# Altium PCB DUTBoard_NO_CAPS_2.PcbDoc (part 5 of 5)
Units mil, origin at the board's own origin, x right, y up, seen from the top; angles counter-clockwise.
Board outline 5475 x 5475 mil, 4 copper layers (Top Layer, Mid-Layer 1, Mid-Layer 2, Bottom Layer); 57 components, 471 nets, 1641 pads, 1025 vias.
Unrouted connection lines stored in the file: 1.
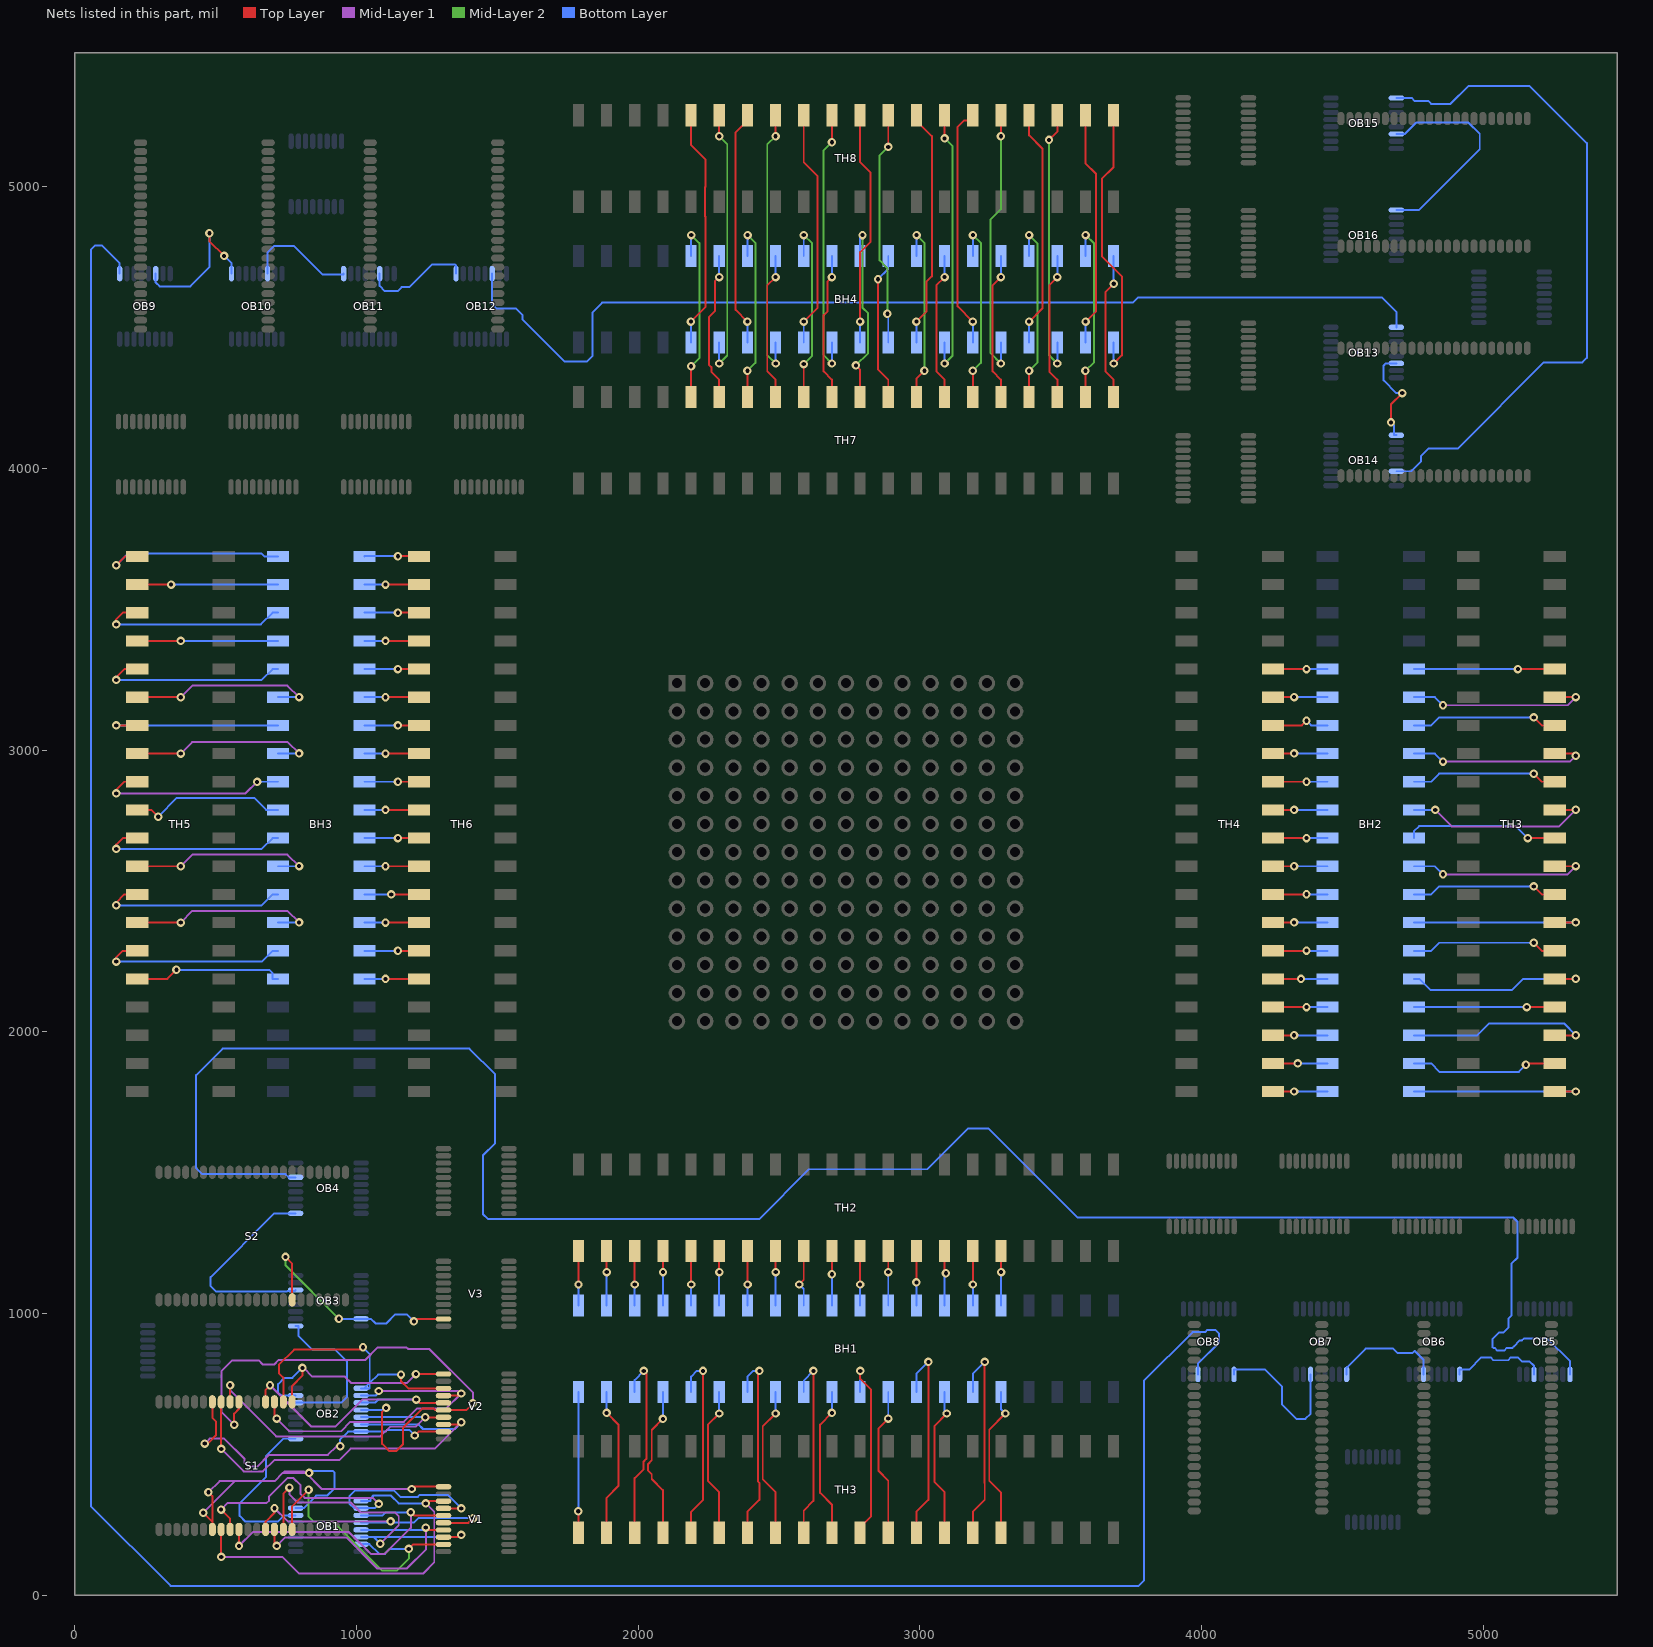
[diagram p7: the nets of this part, all layers, seen from the top]

## Via types
v1: diameter 30, hole 15, Top Layer to Bottom Layer, 1025 vias

## Nets (pads, with @x,y where several pads share a name; then routed paths per layer and width w, separated by ;. In a path a pad name is that pad's centre, name@x,y a point inside that pad or via, vN(x,y) a via of type N, cw(c..) or ccw(c..) an arc to the next point about the centre after c; other vN are vias at no path point) (continued)
OB_D_B111: OB3.D7 S2.DATA15 V3.OVL7 | length 866.1
  Top Layer w7: v1(748,1201) 771.73,1177.27 S2.DATA15@771.73,1048.62 ; v1(1204,972) 1212.43,980.43 V3.OVL7@1308.86,980.43
  Mid-Layer 2 w7: v1(748,1201) 748,1170.61 v1(937.58,981.02)
  Bottom Layer w7: v1(937.58,981.02) OB3.D7@1016.14,981.02 1051,981.02 1067.52,964.5 1105,964.5 1137.5,997 1179,997 v1(1204,972)
OB_D_B112: OB2.D0 S1.DATA0 V2.OVL0 | length 877.4
  Top Layer w7: S1.DATA0@771.73,686.38 771.73,742.73 808,779 v1(808,807) ; v1(1211,785.16) V2.OVL0@1308.86,785.16
  Mid-Layer 1 w7: v1(808,807) 812,807 843,776 958.5,776 980.5,754 1179.84,754 v1(1211,785.16)
  Bottom Layer w7: OB2.D0@783.86,708.98 732.02,708.98 722,719 722,749 744.5,771.5 772.5,771.5 v1(808,807)
OB_D_B113: OB2.D1 S1.DATA1 V2.OVL1 | length 983.1
  Top Layer w7: S1.DATA1@740.24,686.38 740.24,772.46 724.5,788.2 724.5,817.77 778.73,872 1015,872 v1(1023,880) ; v1(1158,783) 1158,759.98 1184,733.98 V2.OVL1@1308.86,733.98
  Bottom Layer w7: OB2.D1@1016.14,734.57 OB2.D1@1028,734.57 ; v1(1023,880) 1047,856 1047,753.57 ; v1(1158,783) 1076.43,783 1047,753.57 ; OB2.D1@1028,734.57 1047,753.57 ; OB2.D1@1028,734.57 1047,734.57 1047,753.57
OB_D_B114: OB2.D2 S1.DATA2 V2.OVL2 | length 1227.4
  Top Layer w7: S1.DATA2@708.74,686.38 708.74,635.26 v1(717,627) ; V2.OVL2@1308.86,708.39 1364.39,708.39 v1(1372,716)
  Mid-Layer 1 w7: v1(717,627) 762,582 945.09,582 978.09,615 1168,615 1216,663 1319,663 v1(1372,716) 1363.02,724.98 v1(1078.7,724.98)
  Bottom Layer w7: OB2.D2@1016.14,708.98 1067.68,708.98 1078.7,720 v1(1078.7,724.98)
OB_D_B115: OB2.D3 S1.DATA3 V2.OVL3 | length 985.7
  Top Layer w7: S1.DATA3@677.24,686.38 677.24,729.24 v1(693,745) ; v1(1212,694.3) 1223.5,682.8 V2.OVL3@1308.86,682.8
  Mid-Layer 1 w7: v1(693,745) 838.5,599.5 925.59,599.5 1020.39,694.3 v1(1212,694.3)
  Bottom Layer w7: OB2.D3@1016.14,683.39 1065.61,683.39 1076.52,694.3 v1(1212,694.3)
OB_D_B116: OB2.D4 S1.DATA4 V2.OVL4 | length 2008.4
  Top Layer w7: v1(566,605) 566,644.24 582.76,661 S1.DATA4@582.76,686.38 ; v1(1105,665) 1091,651 1091,537 1116,512 1141,512 1165,536 1165,594 1233,662 1275,662 1279.8,657.2 V2.OVL4@1308.86,657.2 1389.2,657.2 v1(1413,681)
  Mid-Layer 1 w7: v1(566,605) 521,650 521,796 558.5,833.5 653.5,833.5 668,819 708,819 724.5,835.5 819.81,835.5 820.31,835 1031,835 1076,880 1177,880 1183,874 1259,874 1413,720 v1(1413,681)
  Bottom Layer w7: OB2.D4@1016.14,657.8 1097.8,657.8 v1(1105,665)
OB_D_B117: OB2.D5 S1.DATA5 V2.OVL5 | length 1157.8
  Top Layer w7: S1.DATA5@551.26,686.38 v1(551.26,745) ; v1(1244.39,631.61) V2.OVL5@1308.86,631.61
  Mid-Layer 1 w7: v1(551.26,745) 551.26,727.74 715,564 1085,564 1119,598 1210.77,598 v1(1244.39,631.61)
  Bottom Layer w7: OB2.D5@1016.14,632.2 1243.8,632.2 v1(1244.39,631.61)
OB_D_B118: OB2.D6 S1.DATA6 V2.OVL6 | length 1563.8
  Top Layer w7: v1(519.76,519.24) S1.DATA6@519.76,686.38 ; V2.OVL6@1308.86,606.02 1364.02,606.02 v1(1372,614)
  Mid-Layer 1 w7: v1(519.76,519.24) 599.48,439.52 668,439.52 709.28,480.81 940.31,480.81 979.5,520 1278,520 v1(1372,614)
  Bottom Layer w7: OB2.D6@1016.14,606.61 1219.5,606.61 1236.11,590 1348,590 v1(1372,614)
OB_D_B119: OB2.D7 S1.DATA7 V2.OVL7 | length 1163.2
  Top Layer w7: v1(461.14,538.14) 471.41,538.14 502,568.73 502,615.53 488.27,629.26 S1.DATA7@488.27,686.38 ; v1(1207,567) 1220.43,580.43 V2.OVL7@1308.86,580.43
  Mid-Layer 1 w7: v1(461.14,538.14) 479,556 530.21,556 602.48,483.73 602.48,470.05 616,456.52 648,456.52 689.48,498 898.69,498 929.69,529 v1(942,529)
  Bottom Layer w7: v1(942,529) 942,553 970.02,581.02 OB2.D7@1016.14,581.02 1103.02,581.02 1109,587 1187,587 v1(1207,567)
OB_D_B120: OB1.D0 S1.DATA8 V1.OVL0 | length 1646.3
  Top Layer w7: v1(456.27,293) 488.27,261 ; v1(474.5,365.52) 488.27,351.76 488.27,261 ; S1.DATA8@488.27,233.62 488.27,261 ; v1(1196,377) 1204.16,385.16 V1.OVL0@1308.86,385.16
  Mid-Layer 1 w7: v1(456.27,293) 568.27,405 ; v1(474.5,365.52) 513.98,405 568.27,405 ; v1(831.61,434) v1@819.31,434 ; v1(1196,377) 876.31,377 v1@819.31,434 ; 568.27,405 709.95,405 738.95,434 ; 738.95,434 743.76,438.81 814.5,438.81 v1@819.31,434 ; 738.95,434 v1@819.31,434
  Bottom Layer w7: OB1.D0@783.86,308.98 812,308.98 856.83,353.8 895.3,353.8 922,380.5 922,435.5 916.11,441.39 839,441.39 v1(831.61,434)
OB_D_B121: OB1.D1 S1.DATA9 V1.OVL1 | length 1437.4
  Top Layer w7: v1(519.76,136) S1.DATA9@519.76,233.62 ; v1(1246,326) 1253.98,333.98 V1.OVL1@1308.86,333.98
  Mid-Layer 1 w7: v1(519.76,136) 737,136 796,77 1236,77 1276,117 1276,296 v1(1246,326)
  Bottom Layer w7: OB1.D1@1016.14,334.57 1050.2,334.57 1050.34,334.7 1050.34,344 1060.34,354 1121.57,354 1149.57,326 v1(1246,326)
OB_D_B122: OB1.D2 S1.DATA10 V1.OVL2 | length 1397.9
  Top Layer w7: v1(519.5,304.02) 551.26,272.26 S1.DATA10@551.26,233.62 ; V1.OVL2@1308.86,308.39 1371.61,308.39 v1(1372,308)
  Mid-Layer 1 w7: v1(519.5,304.02) 543.26,327.78 681.28,327.78 689.5,336 689.5,350.55 754.95,416 776.43,416 801,391.43 801,360.5 816,345.5 1057.5,345.5 v1(1079,324)
  Bottom Layer w7: v1(1079,324) 1063.98,308.98 OB1.D2@1016.14,308.98 991.21,308.98 975.08,325.1 975.08,352.08 994,371 1133.68,371 1156.68,348 1216.5,348 1223.5,355 1325,355 v1(1372,308)
OB_D_B123: OB1.D3 S1.DATA11 V1.OVL3 | length 1116.2
  Top Layer w7: S1.DATA11@582.76,233.62 582.76,175.24 v1(583,175) ; v1(1192.7,294.3) 1204.2,282.8 V1.OVL3@1308.86,282.8
  Mid-Layer 1 w7: v1(583,175) 632,224 973.39,224 1050.89,146.5 1099.89,146.5 1192.7,239.32 v1(1192.7,294.3)
  Bottom Layer w7: OB1.D3@1016.14,283.39 1092.52,283.39 1103.43,294.3 v1(1192.7,294.3)
OB_D_B124: OB1.D4 S1.DATA12 V1.OVL4 | length 1042.6
  Top Layer w7: S1.DATA12@677.24,233.62 677.24,261.24 709,293 v1(709,309) ; V1.OVL4@1308.86,257.2 1397.2,257.2 v1(1414,274)
  Mid-Layer 1 w7: v1(709,309) 756,262 v1(1121,262)
  Bottom Layer w7: OB1.D4@1016.14,257.8 v1@1116.8,257.8 ; v1(1121,262) v1@1116.8,257.8 ; v1(1414,274) 1219.2,274 1203,257.8 v1@1116.8,257.8
OB_D_B125: OB1.D5 S1.DATA13 V1.OVL5 | length 1054.3
  Top Layer w7: S1.DATA13@708.74,233.62 708.74,183.26 v1(717,175) ; v1(1246,240) 1254.39,231.61 V1.OVL5@1308.86,231.61
  Mid-Layer 1 w7: v1(717,175) 747,205 962.95,205 1073.02,94.93 1178.93,94.93 1246,162 v1(1246,240)
  Bottom Layer w7: OB1.D5@1016.14,232.2 1238.2,232.2 v1(1246,240)
OB_D_B126: OB1.D6 S1.DATA14 V1.OVL6 | length 1184.8
  Top Layer w7: S1.DATA14@740.24,233.62 740.24,360.47 v1(762,382.24) ; V1.OVL6@1308.86,206.02 1364.02,206.02 v1(1372,214)
  Mid-Layer 1 w7: v1(762,382.24) 762,358.5 792,328.5 980.5,328.5 1016,293 1137,293 1150,280 1150,248.5 v1(1084.5,183)
  Bottom Layer w7: OB1.D6@1016.14,206.61 1060.89,206.61 ; v1(1084.5,183) 1060.89,206.61 ; v1(1372,214) 1364.61,206.61 1060.89,206.61
OB_D_B127: OB1.D7 S1.DATA15 V1.OVL7 | length 1068.2
  Top Layer w7: S1.DATA15@771.73,233.62 771.73,315.73 v1(830,374) ; v1(1185.57,164.43) 1201.57,180.43 V1.OVL7@1308.86,180.43
  Mid-Layer 2 w7: v1(830,374) 830,279 848,261 917.04,261 1091.04,87 1143,87 1185.57,129.57 v1(1185.57,164.43)
  Bottom Layer w7: OB1.D7@1016.14,181.02 1045.86,181.02 1080.39,146.5 1100.5,146.5 1118.43,164.43 v1(1185.57,164.43)
OUTSIDE_L_W0_U_BOTTOM_HEADER_WRP1: BH1.1 TH2.1 | length 193.3
  Top Layer w7: TH2.1@1787.5,1221.46 1787.5,1103.5 v1(1788,1103)
  Bottom Layer w7: BH1.1@1787.5,1028.54 1787.5,1102.5 v1(1788,1103)
OUTSIDE_L_W0_U_BOTTOM_HEADER_WRP2: BH2.1 TH4.1 | length 193.3
  Top Layer w7: TH4.1@4253.54,1787.5 4327.5,1787.5 v1(4328,1788)
  Bottom Layer w7: v1(4328,1788) 4328.5,1787.5 BH2.1@4446.46,1787.5
OUTSIDE_L_W0_U_BOTTOM_HEADER_WRP3: BH3.1 TH6.1 | length 193.6
  Top Layer w7: v1(1147,3688) 1183.5,3688 1184,3687.5 TH6.1@1221.46,3687.5
  Bottom Layer w7: BH3.1@1028.54,3687.5 1028.54,3688 v1(1147,3688)
OUTSIDE_L_W0_U_BOTTOM_HEADER_WRP4: BH4.1 TH8.1 | length 1014.8
  Top Layer w7: TH8.1@3687.5,5253.54 3687.5,5069.5 3646,5028 3646,4752 3717,4681 3717,4401 v1(3688,4372)
  Bottom Layer w7: BH4.1@3687.5,4446.46 3687.5,4372.5 v1(3688,4372)
OUTSIDE_L_W1_U_BOTTOM_HEADER_WRP1: BH1.2 TH2.2 | length 193.3
  Top Layer w7: TH2.2@1887.5,1221.46 1887.5,1147.5 v1(1888,1147)
  Bottom Layer w7: BH1.2@1887.5,1028.54 1887.5,1146.5 v1(1888,1147)
OUTSIDE_L_W1_U_BOTTOM_HEADER_WRP2: BH2.2 TH4.2 | length 192.9
  Top Layer w7: TH4.2@4253.54,1887.5 v1(4341,1887.5)
  Bottom Layer w7: v1(4341,1887.5) BH2.2@4446.46,1887.5
OUTSIDE_L_W1_U_BOTTOM_HEADER_WRP3: BH3.2 TH6.2 | length 192.9
  Top Layer w7: v1(1103,3587.5) TH6.2@1221.46,3587.5
  Bottom Layer w7: BH3.2@1028.54,3587.5 v1(1103,3587.5)
OUTSIDE_L_W1_U_BOTTOM_HEADER_WRP4: BH4.2 TH8.2 | length 838.2
  Top Layer w7: TH8.2@3587.5,5253.54 3587.5,5082.19 3625,5044.69 3625,4558 v1(3588,4521)
  Bottom Layer w7: BH4.2@3587.5,4446.46 3587.5,4520.5 v1(3588,4521)
OUTSIDE_L_W2_U_BOTTOM_HEADER_WRP1: BH1.3 TH2.3 | length 193.3
  Top Layer w7: TH2.3@1987.5,1221.46 1987.5,1103.5 v1(1988,1103)
  Bottom Layer w7: BH1.3@1987.5,1028.54 1987.5,1102.5 v1(1988,1103)
OUTSIDE_L_W2_U_BOTTOM_HEADER_WRP2: BH2.3 TH4.3 | length 193.3
  Top Layer w7: TH4.3@4253.54,1987.5 4327.5,1987.5 v1(4328,1988)
  Bottom Layer w7: v1(4328,1988) 4328.5,1987.5 BH2.3@4446.46,1987.5
OUTSIDE_L_W2_U_BOTTOM_HEADER_WRP3: BH3.3 TH6.3 | length 192.9
  Top Layer w7: v1(1147,3487.5) TH6.3@1221.46,3487.5
  Bottom Layer w7: BH3.3@1028.54,3487.5 v1(1147,3487.5)
OUTSIDE_L_W2_U_BOTTOM_HEADER_WRP4: BH4.3 TH8.3 | length 980.4
  Top Layer w7: v1(3458,5165.5) 3487.5,5195 TH8.3@3487.5,5253.54
  Mid-Layer 2 w7: v1(3458,5165.5) 3458,4401.5 v1(3487.5,4372)
  Bottom Layer w7: v1(3487.5,4372) BH4.3@3487.5,4446.46
OUTSIDE_L_W3_U_BOTTOM_HEADER_WRP1: BH1.4 TH2.4 | length 193.3
  Top Layer w7: TH2.4@2087.5,1221.46 2087.5,1147.5 v1(2088,1147)
  Bottom Layer w7: BH1.4@2087.5,1028.54 2087.5,1146.5 v1(2088,1147)
OUTSIDE_L_W3_U_BOTTOM_HEADER_WRP2: BH2.4 TH4.4 | length 192.9
  Top Layer w7: TH4.4@4253.54,2087.5 v1(4372,2087.5)
  Bottom Layer w7: v1(4372,2087.5) BH2.4@4446.46,2087.5
OUTSIDE_L_W3_U_BOTTOM_HEADER_WRP3: BH3.4 TH6.4 | length 192.9
  Top Layer w7: v1(1103,3387.5) TH6.4@1221.46,3387.5
  Bottom Layer w7: BH3.4@1028.54,3387.5 v1(1103,3387.5)
OUTSIDE_L_W3_U_BOTTOM_HEADER_WRP4: BH4.4 TH8.4 | length 846.4
  Top Layer w7: v1(3387.5,4521) 3435,4568.5 3435,5134 3387.5,5181.5 TH8.4@3387.5,5253.54
  Bottom Layer w7: BH4.4@3387.5,4446.46 v1(3387.5,4521)
OUTSIDE_L_W4_U_BOTTOM_HEADER_WRP1: BH1.5 TH2.5 | length 193.3
  Top Layer w7: TH2.5@2187.5,1221.46 2187.5,1103.5 v1(2188,1103)
  Bottom Layer w7: BH1.5@2187.5,1028.54 2187.5,1102.5 v1(2188,1103)
OUTSIDE_L_W4_U_BOTTOM_HEADER_WRP2: BH2.5 TH4.5 | length 192.9
  Top Layer w7: TH4.5@4253.54,2187.5 v1(4352.5,2187.5)
  Bottom Layer w7: v1(4352.5,2187.5) BH2.5@4446.46,2187.5
OUTSIDE_L_W4_U_BOTTOM_HEADER_WRP3: BH3.5 TH6.5 | length 192.9
  Top Layer w7: v1(1147,3287.5) TH6.5@1221.46,3287.5
  Bottom Layer w7: BH3.5@1028.54,3287.5 v1(1147,3287.5)
OUTSIDE_L_W4_U_BOTTOM_HEADER_WRP4: BH4.5 TH8.5 | length 987.1
  Top Layer w7: v1(3287.5,5179) TH8.5@3287.5,5253.54
  Mid-Layer 2 w7: v1(3287.5,4372) 3250,4409.5 3250,4881.5 3287.5,4919 v1(3287.5,5179)
  Bottom Layer w7: v1(3287.5,4372) BH4.5@3287.5,4446.46
OUTSIDE_L_W5_U_BOTTOM_HEADER_WRP1: BH1.6 TH2.6 | length 193.3
  Top Layer w7: TH2.6@2287.5,1221.46 2287.5,1147.5 v1(2288,1147)
  Bottom Layer w7: BH1.6@2287.5,1028.54 2287.5,1146.5 v1(2288,1147)
OUTSIDE_L_W5_U_BOTTOM_HEADER_WRP2: BH2.6 TH4.6 | length 193.3
  Top Layer w7: TH4.6@4253.54,2287.5 4371.5,2287.5 v1(4372,2288)
  Bottom Layer w7: v1(4372,2288) 4372.5,2287.5 BH2.6@4446.46,2287.5
OUTSIDE_L_W5_U_BOTTOM_HEADER_WRP3: BH3.6 TH6.6 | length 192.9
  Top Layer w7: v1(1103,3187.5) TH6.6@1221.46,3187.5
  Bottom Layer w7: BH3.6@1028.54,3187.5 v1(1103,3187.5)
OUTSIDE_L_W5_U_BOTTOM_HEADER_WRP4: BH4.6 TH8.6 | length 869.9
  Top Layer w7: v1(3187.5,4521) 3134,4574.5 3134,5212 3156,5234 3187.5,5234 TH8.6@3187.5,5253.54
  Bottom Layer w7: BH4.6@3187.5,4446.46 v1(3187.5,4521)
OUTSIDE_L_W6_U_BOTTOM_HEADER_WRP1: BH1.7 TH2.7 | length 193.3
  Top Layer w7: TH2.7@2387.5,1221.46 2387.5,1103.5 v1(2388,1103)
  Bottom Layer w7: BH1.7@2387.5,1028.54 2387.5,1102.5 v1(2388,1103)
OUTSIDE_L_W6_U_BOTTOM_HEADER_WRP2: BH2.7 TH4.7 | length 193.3
  Top Layer w7: TH4.7@4253.54,2387.5 4327.5,2387.5 v1(4328,2388)
  Bottom Layer w7: v1(4328,2388) 4328.5,2387.5 BH2.7@4446.46,2387.5
OUTSIDE_L_W6_U_BOTTOM_HEADER_WRP3: BH3.7 TH6.7 | length 192.9
  Top Layer w7: v1(1147,3087.5) TH6.7@1221.46,3087.5
  Bottom Layer w7: BH3.7@1028.54,3087.5 v1(1147,3087.5)
OUTSIDE_L_W6_U_BOTTOM_HEADER_WRP4: BH4.7 TH8.7 | length 979.6
  Top Layer w7: v1(3087.5,5171) TH8.7@3087.5,5253.54
  Mid-Layer 2 w7: v1(3087.5,4372) 3116,4400.5 3116,5142.5 v1(3087.5,5171)
  Bottom Layer w7: v1(3087.5,4372) BH4.7@3087.5,4446.46
OUTSIDE_L_W7_U_BOTTOM_HEADER_WRP1: BH1.8 TH2.8 | length 193.3
  Top Layer w7: TH2.8@2487.5,1221.46 2487.5,1147.5 v1(2488,1147)
  Bottom Layer w7: BH1.8@2487.5,1028.54 2487.5,1146.5 v1(2488,1147)
OUTSIDE_L_W7_U_BOTTOM_HEADER_WRP2: BH2.8 TH4.8 | length 193.3
  Top Layer w7: TH4.8@4253.54,2487.5 4371.5,2487.5 v1(4372,2488)
  Bottom Layer w7: v1(4372,2488) 4372.5,2487.5 BH2.8@4446.46,2487.5
OUTSIDE_L_W7_U_BOTTOM_HEADER_WRP3: BH3.8 TH6.8 | length 192.9
  Top Layer w7: v1(1103,2987.5) TH6.8@1221.46,2987.5
  Bottom Layer w7: BH3.8@1028.54,2987.5 v1(1103,2987.5)
OUTSIDE_L_W7_U_BOTTOM_HEADER_WRP4: BH4.8 TH8.8 | length 852.2
  Top Layer w7: v1(2987.5,4521) 3024,4557.5 3024,4663.58 3042,4681.58 3042,5179.5 2987.5,5234 TH8.8@2987.5,5253.54
  Bottom Layer w7: BH4.8@2987.5,4446.46 v1(2987.5,4521)
OUTSIDE_L_W8_U_BOTTOM_HEADER_WRP1: BH1.9 TH2.9 | length 206.2
  Top Layer w7: v1(2571.5,1103) 2587.5,1119 TH2.9@2587.5,1221.46
  Bottom Layer w7: v1(2571.5,1103) 2587.5,1087 BH1.9@2587.5,1028.54
OUTSIDE_L_W8_U_BOTTOM_HEADER_WRP2: BH2.9 TH4.9 | length 192.9
  Top Layer w7: TH4.9@4253.54,2587.5 v1(4328,2587.5)
  Bottom Layer w7: v1(4328,2587.5) BH2.9@4446.46,2587.5
OUTSIDE_L_W8_U_BOTTOM_HEADER_WRP3: BH3.9 TH6.9 | length 192.9
  Top Layer w7: v1(1147,2887.5) TH6.9@1221.46,2887.5
  Bottom Layer w7: BH3.9@1028.54,2887.5 v1(1147,2887.5)
OUTSIDE_L_W8_U_BOTTOM_HEADER_WRP4: BH4.9 TH8.9 | length 832.4
  Top Layer w7: v1(2887.5,5141) TH8.9@2887.5,5253.54
  Mid-Layer 2 w7: v1(2884.37,4548.63) 2884.37,4710.63 2857,4738 2857,5110.5 v1(2887.5,5141)
  Bottom Layer w7: v1(2884.37,4548.63) 2887.5,4545.5 BH4.9@2887.5,4446.46
OUTSIDE_L_W9_U_BOTTOM_HEADER_WRP1: BH1.10 TH2.10 | length 192.9
  Top Layer w7: v1(2687.5,1139) TH2.10@2687.5,1221.46
  Bottom Layer w7: BH1.10@2687.5,1028.54 v1(2687.5,1139)
OUTSIDE_L_W9_U_BOTTOM_HEADER_WRP2: BH2.10 TH4.10 | length 192.9
  Top Layer w7: TH4.10@4253.54,2687.5 v1(4372,2687.5)
  Bottom Layer w7: v1(4372,2687.5) BH2.10@4446.46,2687.5
OUTSIDE_L_W9_U_BOTTOM_HEADER_WRP3: BH3.10 TH6.10 | length 192.9
  Top Layer w7: v1(1103,2787.5) TH6.10@1221.46,2787.5
  Bottom Layer w7: BH3.10@1028.54,2787.5 v1(1103,2787.5)
OUTSIDE_L_W9_U_BOTTOM_HEADER_WRP4: BH4.10 TH8.10 | length 838.2
  Top Layer w7: v1(2787.5,4521) 2787.5,4767 2825,4804.5 2825,5049.5 2787.5,5087 TH8.10@2787.5,5253.54
  Bottom Layer w7: BH4.10@2787.5,4446.46 v1(2787.5,4521)
OUTSIDE_L_W10_U_BOTTOM_HEADER_WRP1: BH1.11 TH2.11 | length 192.9
  Top Layer w7: v1(2787.5,1103) TH2.11@2787.5,1221.46
  Bottom Layer w7: BH1.11@2787.5,1028.54 v1(2787.5,1103)
OUTSIDE_L_W10_U_BOTTOM_HEADER_WRP2: BH2.11 TH4.11 | length 192.9
  Top Layer w7: TH4.11@4253.54,2787.5 v1(4328,2787.5)
  Bottom Layer w7: v1(4328,2787.5) BH2.11@4446.46,2787.5
OUTSIDE_L_W10_U_BOTTOM_HEADER_WRP3: BH3.11 TH6.11 | length 192.9
  Top Layer w7: v1(1147,2687.5) TH6.11@1221.46,2687.5
  Bottom Layer w7: BH3.11@1028.54,2687.5 v1(1147,2687.5)
OUTSIDE_L_W10_U_BOTTOM_HEADER_WRP4: BH4.11 TH8.11 | length 981.3
  Top Layer w7: v1(2687.5,5157) TH8.11@2687.5,5253.54
  Mid-Layer 2 w7: v1(2687.5,4372) 2657,4402.5 2657,5126.5 v1(2687.5,5157)
  Bottom Layer w7: v1(2687.5,4372) BH4.11@2687.5,4446.46
OUTSIDE_L_W11_U_BOTTOM_HEADER_WRP1: BH1.12 TH2.12 | length 192.9
  Top Layer w7: v1(2887.5,1147) TH2.12@2887.5,1221.46
  Bottom Layer w7: BH1.12@2887.5,1028.54 v1(2887.5,1147)
OUTSIDE_L_W11_U_BOTTOM_HEADER_WRP2: BH2.12 TH4.12 | length 192.9
  Top Layer w7: TH4.12@4253.54,2887.5 v1(4372,2887.5)
  Bottom Layer w7: v1(4372,2887.5) BH2.12@4446.46,2887.5
OUTSIDE_L_W11_U_BOTTOM_HEADER_WRP3: BH3.12 TH6.12 | length 192.9
  Top Layer w7: v1(1103,2587.5) TH6.12@1221.46,2587.5
  Bottom Layer w7: BH3.12@1028.54,2587.5 v1(1103,2587.5)
OUTSIDE_L_W11_U_BOTTOM_HEADER_WRP4: BH4.12 TH8.12 | length 848.1
  Top Layer w7: v1(2587.5,4521) 2637,4570.5 2637,5037.5 2587.5,5087 TH8.12@2587.5,5253.54
  Bottom Layer w7: BH4.12@2587.5,4446.46 v1(2587.5,4521)
OUTSIDE_L_W12_U_BOTTOM_HEADER_WRP1: BH1.13 TH2.13 | length 192.9
  Top Layer w7: v1(2987.5,1110.5) TH2.13@2987.5,1221.46
  Bottom Layer w7: BH1.13@2987.5,1028.54 v1(2987.5,1110.5)
OUTSIDE_L_W12_U_BOTTOM_HEADER_WRP2: BH2.13 TH4.13 | length 193.3
  Top Layer w7: TH4.13@4253.54,2987.5 4327.5,2987.5 v1(4328,2988)
  Bottom Layer w7: v1(4328,2988) 4328.5,2987.5 BH2.13@4446.46,2987.5
OUTSIDE_L_W12_U_BOTTOM_HEADER_WRP3: BH3.13 TH6.13 | length 192.9
  Top Layer w7: v1(1123,2487.5) TH6.13@1221.46,2487.5
  Bottom Layer w7: BH3.13@1028.54,2487.5 v1(1123,2487.5)
OUTSIDE_L_W12_U_BOTTOM_HEADER_WRP4: BH4.13 TH8.13 | length 980.9
  Top Layer w7: v1(2487.5,5179) TH8.13@2487.5,5253.54
  Mid-Layer 2 w7: v1(2487.5,5179) 2458,5149.5 2458,4402 v1(2488,4372)
  Bottom Layer w7: BH4.13@2487.5,4446.46 2487.5,4372.5 v1(2488,4372)
OUTSIDE_L_W13_U_BOTTOM_HEADER_WRP1: BH1.14 TH2.14 | length 196.6
  Top Layer w7: TH2.14@3087.5,1221.46 3087.5,1147.5 v1(3092,1143)
  Bottom Layer w7: BH1.14@3087.5,1028.54 3087.5,1138.5 v1(3092,1143)
OUTSIDE_L_W13_U_BOTTOM_HEADER_WRP2: BH2.14 TH4.14 | length 206.6
  Top Layer w7: TH4.14@4253.54,3087.5 4355.5,3087.5 v1(4372,3104)
  Bottom Layer w7: v1(4372,3104) 4388.5,3087.5 BH2.14@4446.46,3087.5
OUTSIDE_L_W13_U_BOTTOM_HEADER_WRP3: BH3.14 TH6.14 | length 192.9
  Top Layer w7: v1(1103,2387.5) TH6.14@1221.46,2387.5
  Bottom Layer w7: BH3.14@1028.54,2387.5 v1(1103,2387.5)
OUTSIDE_L_W13_U_BOTTOM_HEADER_WRP4: BH4.14 TH8.14 | length 841.5
  Top Layer w7: v1(2387.5,4521) 2346,4562.5 2346,5192.5 2387.5,5234 TH8.14@2387.5,5253.54
  Bottom Layer w7: BH4.14@2387.5,4446.46 v1(2387.5,4521)
OUTSIDE_L_W14_U_BOTTOM_HEADER_WRP1: BH1.15 TH2.15 | length 193.3
  Top Layer w7: TH2.15@3187.5,1221.46 3187.5,1103.5 v1(3188,1103)
  Bottom Layer w7: BH1.15@3187.5,1028.54 3187.5,1102.5 v1(3188,1103)
OUTSIDE_L_W14_U_BOTTOM_HEADER_WRP2: BH2.15 TH4.15 | length 193.3
  Top Layer w7: TH4.15@4253.54,3187.5 4327.5,3187.5 v1(4328,3188)
  Bottom Layer w7: v1(4328,3188) 4328.5,3187.5 BH2.15@4446.46,3187.5
OUTSIDE_L_W14_U_BOTTOM_HEADER_WRP3: BH3.15 TH6.15 | length 192.9
  Top Layer w7: v1(1147,2287.5) TH6.15@1221.46,2287.5
  Bottom Layer w7: BH3.15@1028.54,2287.5 v1(1147,2287.5)
OUTSIDE_L_W14_U_BOTTOM_HEADER_WRP4: BH4.15 TH8.15 | length 979.6
  Top Layer w7: v1(2287.5,5179) TH8.15@2287.5,5253.54
  Mid-Layer 2 w7: v1(2287.5,4372) 2316,4400.5 2316,5150.5 v1(2287.5,5179)
  Bottom Layer w7: v1(2287.5,4372) BH4.15@2287.5,4446.46
OUTSIDE_L_W15_U_BOTTOM_HEADER_WRP1: BH1.16 TH2.16 | length 193.3
  Top Layer w7: TH2.16@3287.5,1221.46 3287.5,1147.5 v1(3288,1147)
  Bottom Layer w7: BH1.16@3287.5,1028.54 3287.5,1146.5 v1(3288,1147)
OUTSIDE_L_W15_U_BOTTOM_HEADER_WRP2: BH2.16 TH4.16 | length 192.9
  Top Layer w7: TH4.16@4253.54,3287.5 v1(4372,3287.5)
  Bottom Layer w7: v1(4372,3287.5) BH2.16@4446.46,3287.5
OUTSIDE_L_W15_U_BOTTOM_HEADER_WRP3: BH3.16 TH6.16 | length 192.9
  Top Layer w7: v1(1103,2187.5) TH6.16@1221.46,2187.5
  Bottom Layer w7: BH3.16@1028.54,2187.5 v1(1103,2187.5)
OUTSIDE_L_W15_U_BOTTOM_HEADER_WRP4: BH4.16 TH8.16 | length 849.9
  Top Layer w7: v1(2187,4521) 2238,4572 2238,4893.77 2237.31,4894.45 2237.31,4998.46 2238,4999.14 2238,5097 2187.5,5147.5 TH8.16@2187.5,5253.54
  Bottom Layer w7: v1(2187,4521) 2187.5,4520.5 BH4.16@2187.5,4446.46
OUTSIDE_R_W0_U_BOTTOM_HEADER_WRP1: BH1.40 TH3.1@1787.5,221.46 | length 500
  Top Layer w7: TH3.1@1787.5,221.46 v1(1787.5,298)
  Bottom Layer w7: v1(1787.5,298) BH1.40@1787.5,721.46
OUTSIDE_R_W0_U_BOTTOM_HEADER_WRP2: BH2.40 TH3.1@5253.54,1787.5 | length 649.3
  Top Layer w7: TH3.1@5253.54,1787.5 5327.5,1787.5 v1(5328,1788)
  Bottom Layer w7: BH2.40@4753.54,1787.5 5327.5,1787.5 v1(5328,1788)
OUTSIDE_R_W0_U_BOTTOM_HEADER_WRP3: BH3.40 TH5.1 | length 683.3
  Top Layer w7: v1(147,3656) 178.5,3687.5 TH5.1@221.46,3687.5
  Bottom Layer w7: v1(147,3656) 188.5,3697.5 663,3697.5 673,3687.5 BH3.40@721.46,3687.5
OUTSIDE_R_W0_U_BOTTOM_HEADER_WRP4: BH4.40 TH7.1 | length 523.6
  Top Layer w7: TH7.1@3687.5,4253.54 3687.5,4314.5 3659,4343 3659,4626.5 v1(3687.5,4655)
  Bottom Layer w7: v1(3687.5,4655) BH4.40@3687.5,4753.54
OUTSIDE_R_W1_U_BOTTOM_HEADER_WRP1: BH1.39 TH3.2@1887.5,221.46 | length 535.2
  Top Layer w7: TH3.2@1887.5,221.46 1887.5,345.5 1930,388 1930,604.5 v1(1887.5,647)
  Bottom Layer w7: v1(1887.5,647) BH1.39@1887.5,721.46
OUTSIDE_R_W1_U_BOTTOM_HEADER_WRP2: BH2.39 TH3.2@5253.54,1887.5 | length 524.4
  Top Layer w7: v1(5151,1883) 5155.5,1887.5 TH3.2@5253.54,1887.5
  Bottom Layer w7: BH2.39@4753.54,1887.5 4814.5,1887.5 4844,1858 5126,1858 v1(5151,1883)
OUTSIDE_R_W1_U_BOTTOM_HEADER_WRP3: BH3.39 TH5.2 | length 500
  Top Layer w7: TH5.2@221.46,3587.5 v1(342,3587.5)
  Bottom Layer w7: v1(342,3587.5) BH3.39@721.46,3587.5
OUTSIDE_R_W1_U_BOTTOM_HEADER_WRP4: BH4.39 TH7.2 | length 674.2
  Top Layer w7: TH7.2@3587.5,4253.54 v1(3587.5,4346)
  Mid-Layer 2 w7: v1(3587.5,4346) 3618,4376.5 3618,4798 v1(3588,4828)
  Bottom Layer w7: BH4.39@3587.5,4753.54 3587.5,4827.5 v1(3588,4828)
OUTSIDE_R_W2_U_BOTTOM_HEADER_WRP1: BH1.38 TH3.3@1987.5,221.46 | length 683.5
  Top Layer w7: TH3.3@1987.5,221.46 1987.5,415.5 2018,446 2018,472.85 2029,483.85 2029,787 v1(2020,796)
  Bottom Layer w7: BH1.38@1987.5,721.46 1987.5,763.5 v1(2020,796)
OUTSIDE_R_W2_U_BOTTOM_HEADER_WRP2: BH2.38 TH3.3@5253.54,1987.5 | length 684.1
  Top Layer w7: TH3.3@5253.54,1987.5 5327.5,1987.5 v1(5328,1988)
  Bottom Layer w7: BH2.38@4753.54,1987.5 4978,1987.5 5020.5,2030 5286,2030 v1(5328,1988)
OUTSIDE_R_W2_U_BOTTOM_HEADER_WRP3: BH3.38 TH5.3 | length 693.8
  Top Layer w7: v1(147,3446) 147,3464 170.5,3487.5 TH5.3@221.46,3487.5
  Bottom Layer w7: v1(147,3446) 660.5,3446 702,3487.5 BH3.38@721.46,3487.5
OUTSIDE_R_W2_U_BOTTOM_HEADER_WRP4: BH4.38 TH7.3 | length 523.6
  Top Layer w7: TH7.3@3487.5,4253.54 3487.5,4314.5 3459,4343 3459,4650.5 v1(3487.5,4679)
  Bottom Layer w7: v1(3487.5,4679) BH4.38@3487.5,4753.54
OUTSIDE_R_W3_U_BOTTOM_HEADER_WRP1: BH1.37 TH3.4@2087.5,221.46 | length 543.5
  Top Layer w7: TH3.4@2087.5,221.46 2087.5,373 2048,412.5 2048,429.2 2035,442.2 2035,465.81 2048,478.81 2048,586.5 v1(2087.5,626)
  Bottom Layer w7: v1(2087.5,626) BH1.37@2087.5,721.46
OUTSIDE_R_W3_U_BOTTOM_HEADER_WRP2: BH2.37 TH3.4@5253.54,2087.5 | length 500
  Top Layer w7: v1(5154,2087.5) TH3.4@5253.54,2087.5
  Bottom Layer w7: BH2.37@4753.54,2087.5 v1(5154,2087.5)
OUTSIDE_R_W3_U_BOTTOM_HEADER_WRP3: BH3.37 TH5.4 | length 500
  Top Layer w7: TH5.4@221.46,3387.5 v1(376,3387.5)
  Bottom Layer w7: v1(376,3387.5) BH3.37@721.46,3387.5
OUTSIDE_R_W3_U_BOTTOM_HEADER_WRP4: BH4.37 TH7.4 | length 673.4
  Top Layer w7: TH7.4@3387.5,4253.54 v1(3387.5,4346)
  Mid-Layer 2 w7: v1(3387.5,4346) 3417,4375.5 3417,4798.5 v1(3387.5,4828)
  Bottom Layer w7: BH4.37@3387.5,4753.54 v1(3387.5,4828)
OUTSIDE_R_W4_U_BOTTOM_HEADER_WRP1: BH1.36 TH3.5@2187.5,221.46 | length 697.5
  Top Layer w7: TH3.5@2187.5,221.46 2187.5,296 2230,338.5 v1(2230,796)
  Bottom Layer w7: BH1.36@2187.5,721.46 2187.5,776 2207.5,796 v1(2230,796)
OUTSIDE_R_W4_U_BOTTOM_HEADER_WRP2: BH2.36 TH3.5@5253.54,2187.5 | length 682
  Top Layer w7: TH3.5@5253.54,2187.5 5327.5,2187.5 v1(5328,2188)
  Bottom Layer w7: BH2.36@4753.54,2187.5 4773,2187.5 4812.5,2148 5101,2148 5141,2188 v1(5328,2188)
OUTSIDE_R_W4_U_BOTTOM_HEADER_WRP3: BH3.36 TH5.5 | length 686.4
  Top Layer w7: v1(147,3249) 147,3258.5 176,3287.5 TH5.5@221.46,3287.5
  Bottom Layer w7: v1(147,3249) 663.5,3249 702,3287.5 BH3.36@721.46,3287.5
OUTSIDE_R_W4_U_BOTTOM_HEADER_WRP4: BH4.36 TH7.5 | length 524.4
  Top Layer w7: TH7.5@3287.5,4253.54 3287.5,4314.5 3258,4344 3258,4649.5 v1(3287.5,4679)
  Bottom Layer w7: v1(3287.5,4679) BH4.36@3287.5,4753.54
OUTSIDE_R_W5_U_BOTTOM_HEADER_WRP1: BH1.35 TH3.6@2287.5,221.46 | length 533.6
  Top Layer w7: TH3.6@2287.5,221.46 2287.5,365.5 2247,406 2247,604.5 v1(2287.5,645)
  Bottom Layer w7: v1(2287.5,645) BH1.35@2287.5,721.46
OUTSIDE_R_W5_U_BOTTOM_HEADER_WRP2: BH2.35 TH3.6@5253.54,2287.5 | length 523.6
  Top Layer w7: v1(5179,2316) 5207.5,2287.5 TH3.6@5253.54,2287.5
  Bottom Layer w7: BH2.35@4753.54,2287.5 4814.5,2287.5 4843,2316 v1(5179,2316)
OUTSIDE_R_W5_U_BOTTOM_HEADER_WRP3: BH3.35 TH5.6 | length 683.5
  Top Layer w7: TH5.6@221.46,3187.5 v1(376,3187.5)
  Mid-Layer 1 w7: v1(376,3187.5) 417.5,3229 755,3229 v1(796,3188)
  Bottom Layer w7: BH3.35@721.46,3187.5 795.5,3187.5 v1(796,3188)
OUTSIDE_R_W5_U_BOTTOM_HEADER_WRP4: BH4.35 TH7.6 | length 672.5
  Top Layer w7: TH7.6@3187.5,4253.54 v1(3187.5,4346)
  Mid-Layer 2 w7: v1(3187.5,4346) 3216,4374.5 3216,4800 v1(3188,4828)
  Bottom Layer w7: BH4.35@3187.5,4753.54 3187.5,4827.5 v1(3188,4828)
OUTSIDE_R_W6_U_BOTTOM_HEADER_WRP1: BH1.34 TH3.7@2387.5,221.46 | length 701.6
  Top Layer w7: TH3.7@2387.5,221.46 2387.5,296 2430,338.5 2430,398.96 2425,403.96 2425,791 v1(2430,796)
  Bottom Layer w7: BH1.34@2387.5,721.46 2387.5,776 2407.5,796 v1(2430,796)
OUTSIDE_R_W6_U_BOTTOM_HEADER_WRP2: BH2.34 TH3.7@5253.54,2387.5 | length 649.3
  Top Layer w7: TH3.7@5253.54,2387.5 5327.5,2387.5 v1(5328,2388)
  Bottom Layer w7: BH2.34@4753.54,2387.5 5327.5,2387.5 v1(5328,2388)
OUTSIDE_R_W6_U_BOTTOM_HEADER_WRP3: BH3.34 TH5.7 | length 648.9
  Top Layer w7: v1(147,3087.5) TH5.7@221.46,3087.5
  Bottom Layer w7: v1(147,3087.5) BH3.34@721.46,3087.5
OUTSIDE_R_W6_U_BOTTOM_HEADER_WRP4: BH4.34 TH7.7 | length 524.4
  Top Layer w7: TH7.7@3087.5,4253.54 3087.5,4314.5 3058,4344 3058,4649.5 v1(3087.5,4679)
  Bottom Layer w7: v1(3087.5,4679) BH4.34@3087.5,4753.54
OUTSIDE_R_W7_U_BOTTOM_HEADER_WRP1: BH1.33 TH3.8@2487.5,221.46 | length 537.7
  Top Layer w7: TH3.8@2487.5,221.46 2487.5,365.5 2442,411 2442,599.5 v1(2487.5,645)
  Bottom Layer w7: v1(2487.5,645) BH1.33@2487.5,721.46
OUTSIDE_R_W7_U_BOTTOM_HEADER_WRP2: BH2.33 TH3.8@5253.54,2487.5 | length 523.6
  Top Layer w7: v1(5179,2516) 5207.5,2487.5 TH3.8@5253.54,2487.5
  Bottom Layer w7: BH2.33@4753.54,2487.5 4814.5,2487.5 4843,2516 v1(5179,2516)
OUTSIDE_R_W7_U_BOTTOM_HEADER_WRP3: BH3.33 TH5.8 | length 682.6
  Top Layer w7: TH5.8@221.46,2987.5 v1(376,2987.5)
  Mid-Layer 1 w7: v1(376,2987.5) 416.5,3028 756,3028 v1(796,2988)
  Bottom Layer w7: BH3.33@721.46,2987.5 795.5,2987.5 v1(796,2988)
OUTSIDE_R_W7_U_BOTTOM_HEADER_WRP4: BH4.33 TH7.8 | length 672.5
  Top Layer w7: TH7.8@2987.5,4253.54 2987.5,4317.5 v1(3016,4346)
  Mid-Layer 2 w7: v1(2988,4828) 3016,4800 v1(3016,4346)
  Bottom Layer w7: BH4.33@2987.5,4753.54 2987.5,4827.5 v1(2988,4828)
OUTSIDE_R_W8_U_BOTTOM_HEADER_WRP1: BH1.32 TH3.9@2587.5,221.46 | length 677.7
  Top Layer w7: TH3.9@2587.5,221.46 2587.5,300.5 2622,335 v1(2622,796)
  Bottom Layer w7: BH1.32@2587.5,721.46 2587.5,761.5 v1(2622,796)
OUTSIDE_R_W8_U_BOTTOM_HEADER_WRP2: BH2.32 TH3.9@5253.54,2587.5 | length 672.9
  Top Layer w7: TH3.9@5253.54,2587.5 5327.5,2587.5 v1(5328,2588)
  Mid-Layer 1 w7: v1(4856.5,2559) 5299,2559 v1(5328,2588)
  Bottom Layer w7: BH2.32@4753.54,2587.5 4828,2587.5 v1(4856.5,2559)
OUTSIDE_R_W8_U_BOTTOM_HEADER_WRP3: BH3.32 TH5.9 | length 690.6
  Top Layer w7: v1(147,2846) 147,2858.5 176,2887.5 TH5.9@221.46,2887.5
  Mid-Layer 1 w7: v1(147,2846) 606,2846 v1(647,2887)
  Bottom Layer w7: v1(647,2887) 647.5,2887.5 BH3.32@721.46,2887.5
OUTSIDE_R_W8_U_BOTTOM_HEADER_WRP4: BH4.32 TH7.9 | length 530.2
  Top Layer w7: v1(2851,4671) 2851,4351 2887.5,4314.5 TH7.9@2887.5,4253.54
  Bottom Layer w7: v1(2851,4671) 2887.5,4707.5 BH4.32@2887.5,4753.54
OUTSIDE_R_W9_U_BOTTOM_HEADER_WRP1: BH1.31 TH3.10@2687.5,221.46 | length 534.4
  Top Layer w7: TH3.10@2687.5,221.46 2687.5,322 2646,363.5 2646,605.5 v1(2687.5,647)
  Bottom Layer w7: v1(2687.5,647) BH1.31@2687.5,721.46
OUTSIDE_R_W9_U_BOTTOM_HEADER_WRP2: BH2.31 TH3.10@5253.54,2687.5 | length 549.6
  Top Layer w7: v1(5157,2687.5) TH3.10@5253.54,2687.5
  Bottom Layer w7: BH2.31@4753.54,2687.5 4753.54,2712 4771.54,2730 5114.5,2730 v1(5157,2687.5)
OUTSIDE_R_W9_U_BOTTOM_HEADER_WRP3: BH3.31 TH5.10 | length 555.1
  Top Layer w7: TH5.10@221.46,2787.5 272,2787.5 v1(296,2763.5)
  Bottom Layer w7: v1(296,2763.5) 362.5,2830 636.5,2830 679,2787.5 BH3.31@721.46,2787.5
OUTSIDE_R_W9_U_BOTTOM_HEADER_WRP4: BH4.31 TH7.10 | length 684.7
  Top Layer w7: v1(2772.77,4365.12) 2787.5,4350.39 TH7.10@2787.5,4253.54
  Mid-Layer 2 w7: v1(2772.77,4365.12) 2816,4408.35 2816,4550 2796,4570 v1(2796,4828)
  Bottom Layer w7: BH4.31@2787.5,4753.54 2787.5,4819.5 v1(2796,4828)
OUTSIDE_R_W10_U_BOTTOM_HEADER_WRP1: BH1.30 TH3.11@2787.5,221.46 | length 681.8
  Top Layer w7: TH3.11@2787.5,221.46 2787.5,241 2827,280.5 2827,729 2788,768 v1(2788,796)
  Bottom Layer w7: BH1.30@2787.5,721.46 2787.5,795.5 v1(2788,796)
OUTSIDE_R_W10_U_BOTTOM_HEADER_WRP2: BH2.30 TH3.11@5253.54,2787.5 | length 697.8
  Top Layer w7: TH3.11@5253.54,2787.5 5327.5,2787.5 v1(5328,2788)
  Mid-Layer 1 w7: v1(4829,2787.5) 4887.5,2729 5269,2729 v1(5328,2788)
  Bottom Layer w7: BH2.30@4753.54,2787.5 v1(4829,2787.5)
OUTSIDE_R_W10_U_BOTTOM_HEADER_WRP3: BH3.30 TH5.11 | length 689.6
  Top Layer w7: v1(147,2649) 147,2664 170.5,2687.5 TH5.11@221.46,2687.5
  Bottom Layer w7: v1(147,2649) 663.5,2649 702,2687.5 BH3.30@721.46,2687.5
OUTSIDE_R_W10_U_BOTTOM_HEADER_WRP4: BH4.30 TH7.11 | length 524.4
  Top Layer w7: TH7.11@2687.5,4253.54 2687.5,4314.5 2658,4344 2658,4543.42 2671,4556.42 2671,4662.5 v1(2687.5,4679)
  Bottom Layer w7: v1(2687.5,4679) BH4.30@2687.5,4753.54
OUTSIDE_R_W11_U_BOTTOM_HEADER_WRP1: BH1.29 TH3.12@2887.5,221.46 | length 528.6
  Top Layer w7: TH3.12@2887.5,221.46 2887.5,406.5 2853,441 2853,592.5 v1(2887.5,627)
  Bottom Layer w7: v1(2887.5,627) BH1.29@2887.5,721.46
OUTSIDE_R_W11_U_BOTTOM_HEADER_WRP2: BH2.29 TH3.12@5253.54,2887.5 | length 523.6
  Top Layer w7: v1(5179,2916) 5207.5,2887.5 TH3.12@5253.54,2887.5
  Bottom Layer w7: BH2.29@4753.54,2887.5 4814.5,2887.5 4843,2916 v1(5179,2916)
OUTSIDE_R_W11_U_BOTTOM_HEADER_WRP3: BH3.29 TH5.12 | length 683.5
  Top Layer w7: TH5.12@221.46,2587.5 v1(376,2587.5)
  Mid-Layer 1 w7: v1(376,2587.5) 417.5,2629 755,2629 v1(796,2588)
  Bottom Layer w7: BH3.29@721.46,2587.5 795.5,2587.5 v1(796,2588)
OUTSIDE_R_W11_U_BOTTOM_HEADER_WRP4: BH4.29 TH7.12 | length 673.4
  Top Layer w7: TH7.12@2587.5,4253.54 v1(2587.5,4370)
  Mid-Layer 2 w7: v1(2587.5,4370) 2617,4399.5 2617,4798.5 v1(2587.5,4828)
  Bottom Layer w7: BH4.29@2587.5,4753.54 v1(2587.5,4828)
OUTSIDE_R_W12_U_BOTTOM_HEADER_WRP1: BH1.28 TH3.13@2987.5,221.46 | length 748.3
  Top Layer w7: TH3.13@2987.5,221.46 2987.5,296 3030,338.5 v1(3030,828)
  Bottom Layer w7: BH1.28@2987.5,721.46 2987.5,785.5 v1(3030,828)
OUTSIDE_R_W12_U_BOTTOM_HEADER_WRP2: BH2.28 TH3.13@5253.54,2987.5 | length 672.5
  Top Layer w7: TH3.13@5253.54,2987.5 5320.5,2987.5 v1(5328,2980)
  Mid-Layer 1 w7: v1(4856.5,2959) 5307,2959 v1(5328,2980)
  Bottom Layer w7: BH2.28@4753.54,2987.5 4828,2987.5 v1(4856.5,2959)
OUTSIDE_R_W12_U_BOTTOM_HEADER_WRP3: BH3.28 TH5.13 | length 686.4
  Top Layer w7: v1(147,2449) 147,2458.5 176,2487.5 TH5.13@221.46,2487.5
  Bottom Layer w7: v1(147,2449) 663.5,2449 702,2487.5 BH3.28@721.46,2487.5
OUTSIDE_R_W12_U_BOTTOM_HEADER_WRP4: BH4.28 TH7.13 | length 524.4
  Top Layer w7: TH7.13@2487.5,4253.54 2487.5,4314.5 2458,4344 2458,4649.5 v1(2487.5,4679)
  Bottom Layer w7: v1(2487.5,4679) BH4.28@2487.5,4753.54
OUTSIDE_R_W13_U_BOTTOM_HEADER_WRP1: BH1.27 TH3.14@3087.5,221.46 | length 536.9
  Top Layer w7: TH3.14@3087.5,221.46 3087.5,365.5 3051,402 3051,600.5 v1(3095.5,645)
  Bottom Layer w7: BH1.27@3087.5,721.46 3087.5,653 v1(3095.5,645)
OUTSIDE_R_W13_U_BOTTOM_HEADER_WRP2: BH2.27 TH3.14@5253.54,3087.5 | length 523.6
  Top Layer w7: v1(5179,3116) 5207.5,3087.5 TH3.14@5253.54,3087.5
  Bottom Layer w7: BH2.27@4753.54,3087.5 4814.5,3087.5 4843,3116 v1(5179,3116)
OUTSIDE_R_W13_U_BOTTOM_HEADER_WRP3: BH3.27 TH5.14 | length 683.5
  Top Layer w7: TH5.14@221.46,2387.5 v1(376,2387.5)
  Mid-Layer 1 w7: v1(376,2387.5) 417.5,2429 755,2429 v1(796,2388)
  Bottom Layer w7: BH3.27@721.46,2387.5 795.5,2387.5 v1(796,2388)
OUTSIDE_R_W13_U_BOTTOM_HEADER_WRP4: BH4.27 TH7.14 | length 672.5
  Top Layer w7: TH7.14@2387.5,4253.54 v1(2387.5,4346)
  Mid-Layer 2 w7: v1(2387.5,4346) 2416,4374.5 2416,4800 v1(2388,4828)
  Bottom Layer w7: BH4.27@2387.5,4753.54 2387.5,4827.5 v1(2388,4828)
OUTSIDE_R_W14_U_BOTTOM_HEADER_WRP1: BH1.26 TH3.15@3187.5,221.46 | length 749.1
  Top Layer w7: TH3.15@3187.5,221.46 3187.5,296 3230,338.5 3230,398.96 3229,399.96 3229,827 v1(3230,828)
  Bottom Layer w7: BH1.26@3187.5,721.46 3187.5,785.5 v1(3230,828)
OUTSIDE_R_W14_U_BOTTOM_HEADER_WRP2: BH2.26 TH3.15@5253.54,3187.5 | length 672.9
  Top Layer w7: TH3.15@5253.54,3187.5 5327.5,3187.5 v1(5328,3188)
  Mid-Layer 1 w7: v1(4856.5,3159) 5299,3159 v1(5328,3188)
  Bottom Layer w7: BH2.26@4753.54,3187.5 4828,3187.5 v1(4856.5,3159)
OUTSIDE_R_W14_U_BOTTOM_HEADER_WRP3: BH3.26 TH5.15 | length 689.6
  Top Layer w7: v1(147,2249) 147,2264 170.5,2287.5 TH5.15@221.46,2287.5
  Bottom Layer w7: v1(147,2249) 663.5,2249 702,2287.5 BH3.26@721.46,2287.5
OUTSIDE_R_W14_U_BOTTOM_HEADER_WRP4: BH4.26 TH7.15 | length 530.2
  Top Layer w7: TH7.15@2287.5,4253.54 2287.5,4314.5 2260,4342 2260,4359.2 2251,4368.2 2251,4536.92 2272,4557.92 2272,4663.5 v1(2287.5,4679)
  Bottom Layer w7: v1(2287.5,4679) BH4.26@2287.5,4753.54
OUTSIDE_R_W15_U_BOTTOM_HEADER_WRP1: BH1.25 TH3.16@3287.5,221.46 | length 547.6
  Top Layer w7: TH3.16@3287.5,221.46 3287.5,365.5 3246,407 3246,587.5 v1(3303.5,645)
  Bottom Layer w7: BH1.25@3287.5,721.46 3287.5,661 v1(3303.5,645)
OUTSIDE_R_W15_U_BOTTOM_HEADER_WRP2: BH2.25 TH3.16@5253.54,3287.5 | length 500
  Top Layer w7: v1(5122.5,3287.5) TH3.16@5253.54,3287.5
  Bottom Layer w7: BH2.25@4753.54,3287.5 v1(5122.5,3287.5)
OUTSIDE_R_W15_U_BOTTOM_HEADER_WRP3: BH3.25 TH5.16 | length 538.9
  Top Layer w7: TH5.16@221.46,2187.5 328.5,2187.5 v1(361,2220)
  Bottom Layer w7: v1(361,2220) 690,2220 702,2208 702,2187.5 BH3.25@721.46,2187.5
OUTSIDE_R_W15_U_BOTTOM_HEADER_WRP4: BH4.25 TH7.16 | length 673.4
  Top Layer w7: TH7.16@2187.5,4253.54 v1(2187.5,4362)
  Mid-Layer 2 w7: v1(2187.5,4362) 2217,4391.5 2217,4799 v1(2188,4828)
  Bottom Layer w7: BH4.25@2187.5,4753.54 2187.5,4827.5 v1(2188,4828)
SER0: OB15.DS OB16.Q | length 769.3
  Bottom Layer w7: OB16.Q@4691.14,4916.57 4771.07,4916.57 4987,5132.5 4987,5186.85 4946.35,5227.5 4761.89,5227.5 4721,5186.61 OB15.DS@4691.14,5186.61
SER1: OB14.DS OB15.Q | length 2410.4
  Bottom Layer w7: OB14.DS@4691.14,3989.61 4743.61,3989.61 4778,4024 4778,4043.24 4805.76,4071 4910,4071 5215,4376 5351,4376 5367,4392 5367,5154 5164.5,5356.5 4946.24,5356.5 4883.24,5293.5 4814.65,5293.5 4803.74,5304.4 4755.17,5304.4 4745,5314.57 OB15.Q@4691.14,5314.57
SER2: OB13.DS OB14.Q | length 364.6
  Top Layer w7: v1(4672,4163) 4672,4227 v1(4712,4267)
  Bottom Layer w7: v1(4672,4163) 4683,4152 4683,4117.57 OB14.Q@4691.14,4117.57 ; OB13.DS@4691.14,4372.61 4653.61,4372.61 4646,4365 4646,4312 4691,4267 v1(4712,4267)
SER3: OB12.DS OB13.Q | length 3673.6
  Bottom Layer w7: OB12.DS@1481.39,4691.14 1481.39,4584 1498.39,4567 1566.59,4567 1588.5,4545.09 1588.5,4529.5 1739,4379 1818,4379 1838,4399 1838,4554 1872,4588 3756,4588 3775,4607 4639.5,4607 4692,4554.5 4692,4500.57 OB13.Q@4691.14,4500.57
SER4: OB11.DS OB12.Q | length 392.2
  Bottom Layer w7: OB11.DS@1082.39,4691.14 1082.39,4647.55 1100.93,4629 1145.99,4629 1159.99,4643 1188,4643 1269,4724 1349.43,4724 1353.43,4720 OB12.Q@1353.43,4691.14
SER5: OB10.DS OB11.Q | length 400.3
  Bottom Layer w7: OB10.DS@684.39,4691.14 684.39,4766.39 707,4789 778.5,4789 880,4687.5 954.43,4687.5 OB11.Q@954.43,4691.14
SER6: OB9.DS OB10.Q | length 551.3
  Top Layer w7: v1(478,4834) 478,4806 v1(530,4754)
  Bottom Layer w7: OB9.DS@287.39,4691.14 287.39,4659.61 301,4646 410,4646 478,4714 v1(478,4834) ; v1(530,4754) 556.43,4727.57 OB10.Q@556.43,4691.14
SER7: OB8.DS OB9.Q | length 9726.3
  Bottom Layer w7: OB9.Q@159.43,4691.14 159.43,4727.57 96,4791 72,4791 57,4776 57,316 340,33 3776,33 3795,52 3795,761 3968,934 4012.73,934 4020.44,941.71 4048.29,941.71 4062,928 4062,897 3986.61,821.61 OB8.DS@3986.61,783.86
SER8: OB7.DS OB8.Q | length 546.5
  Bottom Layer w7: OB8.Q@4114.57,783.86 4114.57,801.5 4224,801.5 4285.36,740.14 4285.36,676.64 4336,626 4368,626 4386.61,644.61 OB7.DS@4386.61,783.86
SER9: OB6.DS OB7.Q | length 399.4
  Bottom Layer w7: OB7.Q@4514.57,783.86 4514.57,807.98 4582.09,875.5 4679.83,875.5 4696.11,859.22 4747.89,859.22 4755.59,866.91 4787.61,834.89 OB6.DS@4787.61,783.86
SER10: OB5.DS OB6.Q | length 349.8
  Bottom Layer w7: OB6.Q@4915.57,783.86 4915.57,801 4950,801 4993,844 5025.8,844 5035.71,834.1 5087.48,834.1 5097.39,844 5122.39,844 5136.2,830.2 5163.42,830.2 5179.61,814 OB5.DS@5179.61,783.86
SER11: OB4.DS OB5.Q | length 7165.9
  Bottom Layer w7: OB4.DS@783.86,1483.39 758.92,1483.39 747.81,1494.5 452.5,1494.5 431,1516 431,1846 525,1940 1401,1940 1492,1849 1492,1604 1449,1561 1449,1353 1467,1335 2429,1335 2606,1512 3026.01,1512 3170,1655.99 3244.01,1655.99 3267,1633 3559,1341 5105,1341 5121,1325 5121,1198 5099,1176 5099,992.23 5088.75,981.98 5088.75,949.75 5071,932 5055,932 5032,909 5032,881 5035,878 5039.89,878 5049.79,868.1 5073.4,868.1 5083.31,878 5102.96,878 5107.5,882.54 5129.46,904.5 5136.85,904.5 5143.35,911 5226.57,911 5307.57,830 OB5.Q@5307.57,783.86
SER12: OB3.DS OB4.Q | length 739.2
  Bottom Layer w7: OB3.DS@783.86,1083.39 781.12,1080.65 756.18,1080.65 754.04,1078.5 500.5,1078.5 482,1097 482,1129 708.43,1355.43 OB4.Q@783.86,1355.43
SER13: OB2.DS OB3.Q | length 573
  Bottom Layer w7: OB2.DS@783.86,683.39 946.1,683.39 967,704.29 967,829 923.48,872.52 841.92,872.52 794.88,919.56 794.88,955.43 OB3.Q@783.86,955.43
SER14: OB1.DS OB2.Q | length 598.7
  Bottom Layer w7: OB1.DS@783.86,283.39 743.39,283.39 721,261 606,261 585,282 585,327 679,421 679,495 739.43,555.43 OB2.Q@783.86,555.43
pads on no net: S1.NC1 S1.NC2 S1.NC3 S2.NC1 S2.NC2 S2.NC3 S3.NC1 S3.NC2 S3.NC3 S4.NC1 S4.NC2 S4.NC3 S5.NC1 S5.NC2 S5.NC3 S6.NC1 S6.NC2 S6.NC3 S7.NC1 S7.NC2 S7.NC3 S8.NC1 S8.NC2 S8.NC3 ZIF.129 ZIF.130 ZIF.131 ZIF.132 ZIF.133 ZIF.134 ZIF.135 ZIF.136 ZIF.137 ZIF.138 ZIF.139 ZIF.140 ZIF.141 ZIF.142 ZIF.143 ZIF.144 ZIF.145 ZIF.146 ZIF.147 ZIF.148 ZIF.149 ZIF.150 ZIF.151 ZIF.152 ZIF.153 ZIF.154 ZIF.155 ZIF.156 ZIF.157 ZIF.158 ZIF.159 ZIF.160 ZIF.161 ZIF.162 ZIF.163 ZIF.164 ZIF.165 ZIF.166 ZIF.167 ZIF.168 ZIF.169

## Silkscreen, mask and mechanical layers (free items; w line width, h text height)
Mechanical 3:
  the board outline again, w10